# Altium PCB KE_PDB_BMS_ver2.PcbDoc
Units mm, origin at the board's own origin, x right, y up, seen from the top; angles counter-clockwise.
Board outline 50.9 x 59.37 mm, 4 copper layers (L1 [Signal], L2 [GND], L3 [Power], L4 [Signal]), stack 1.369 mm thick; 43 components, 31 nets, 163 pads, 72 vias.
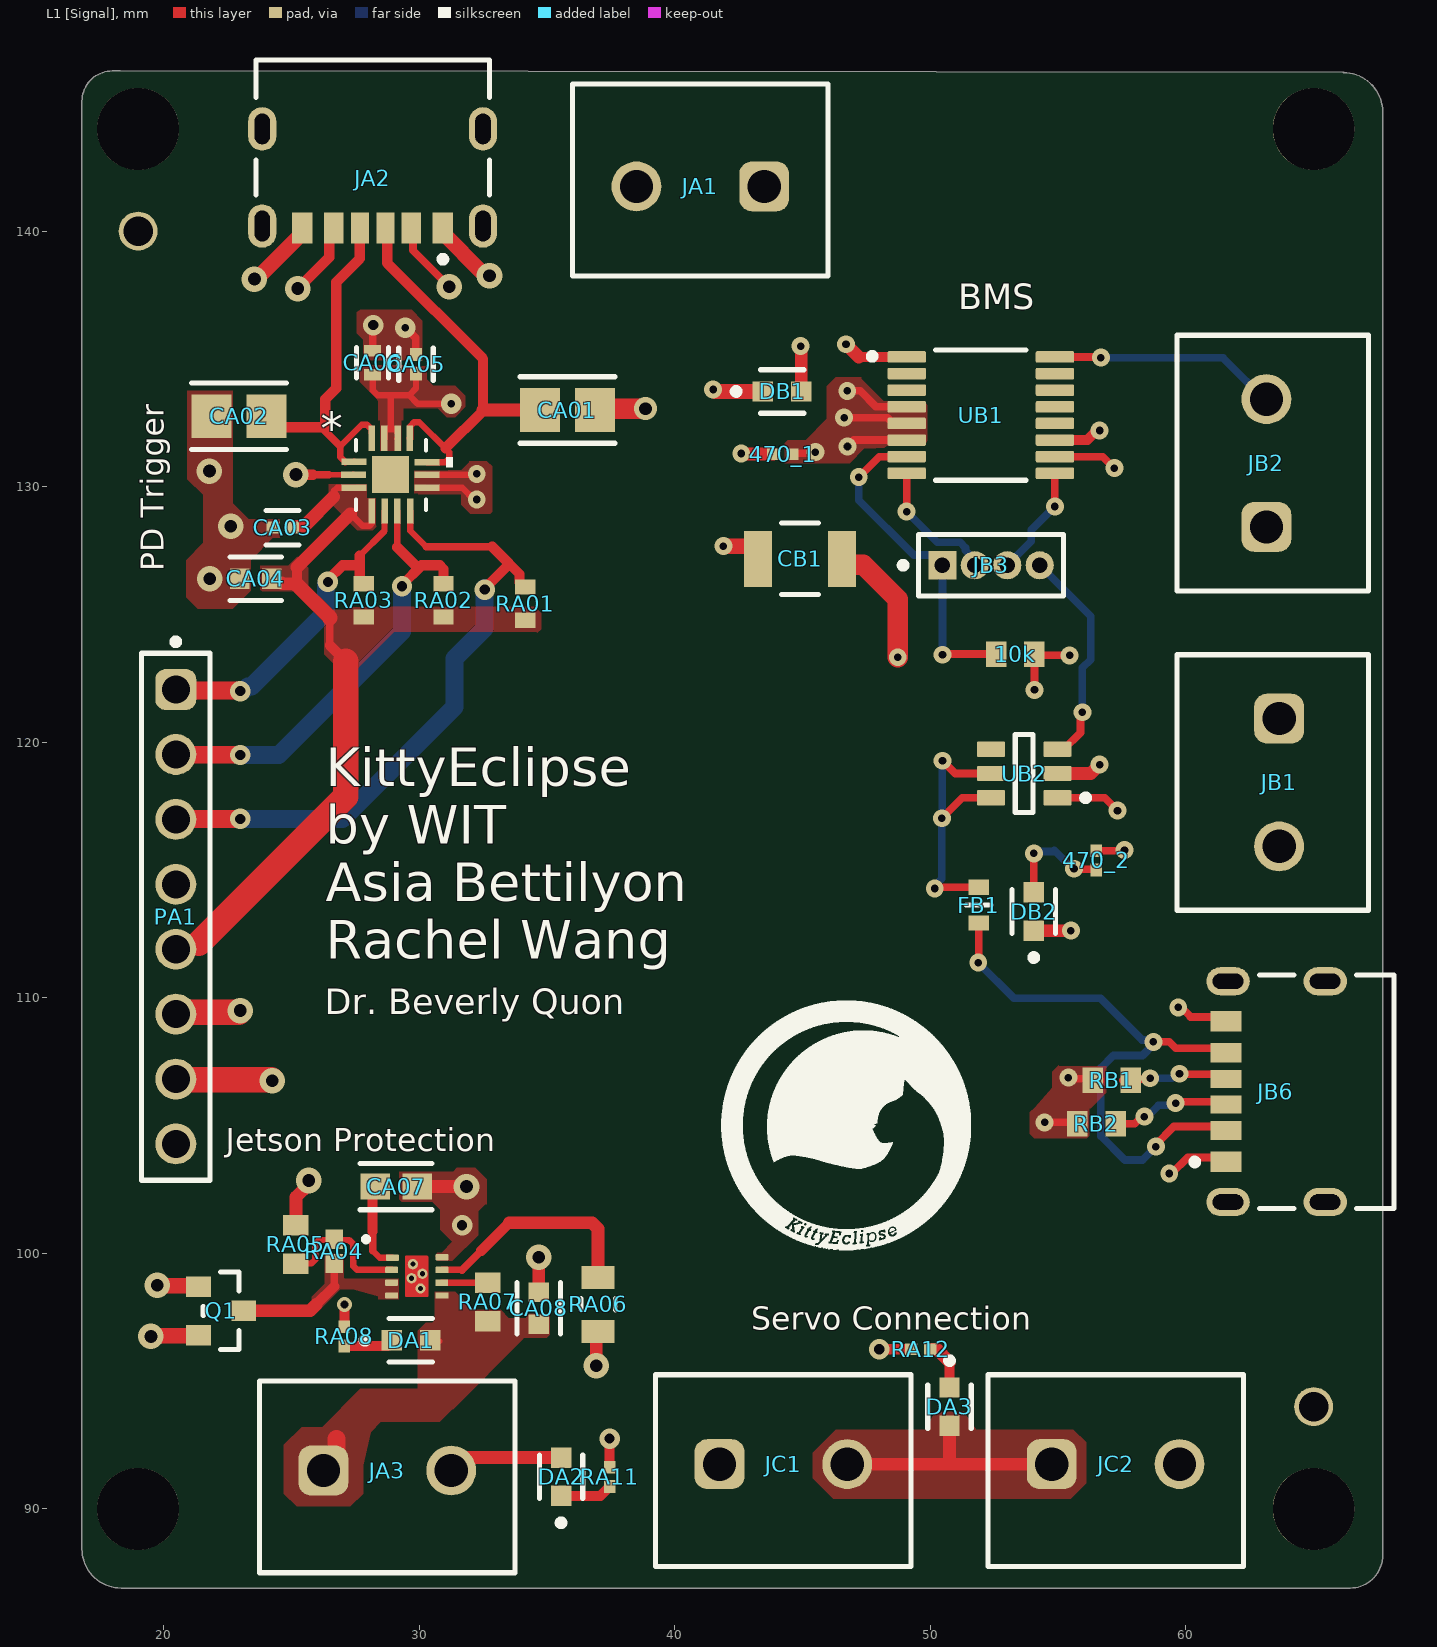
[diagram p0: L1 [Signal] view]
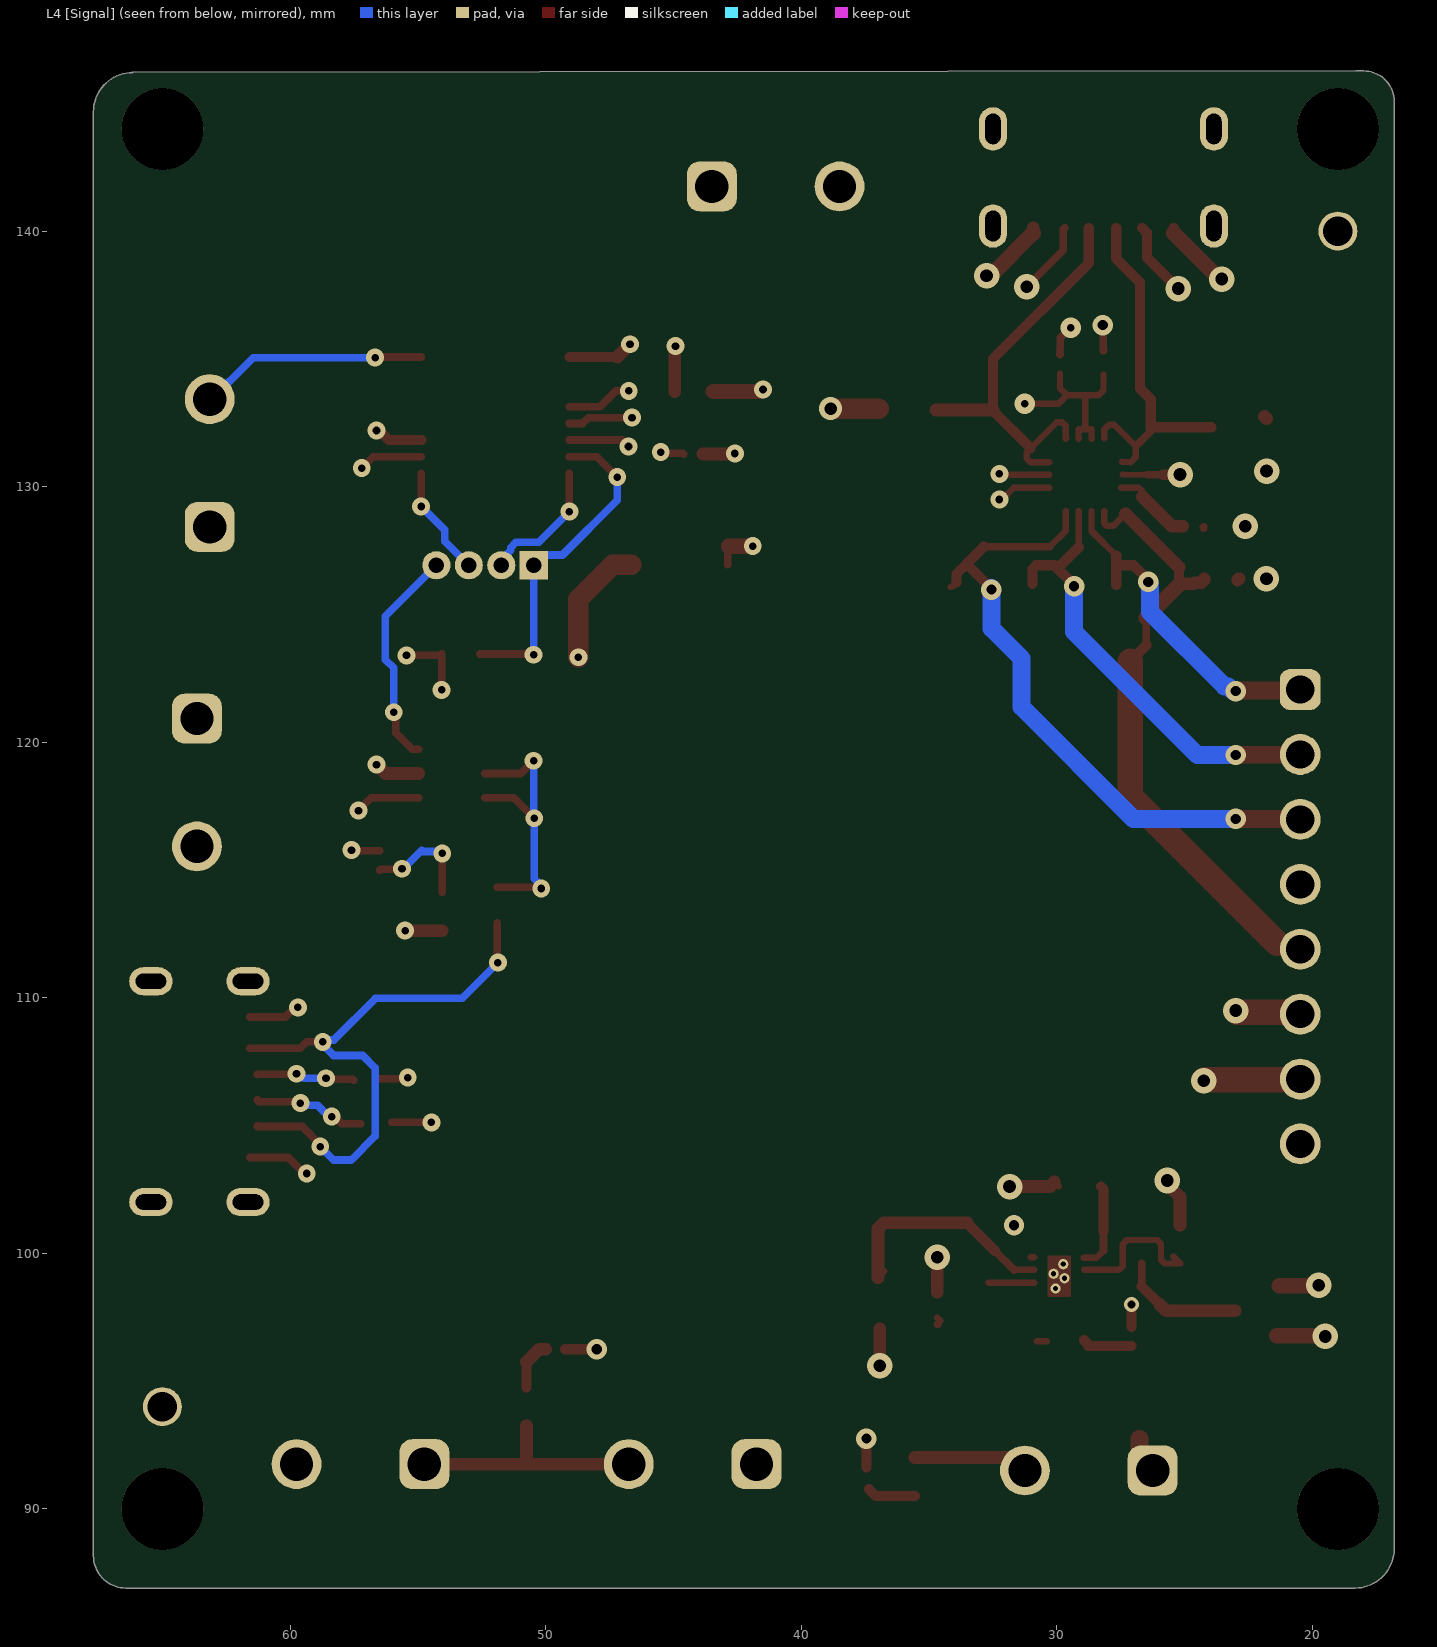
[diagram p1: L4 [Signal] view, seen from below]
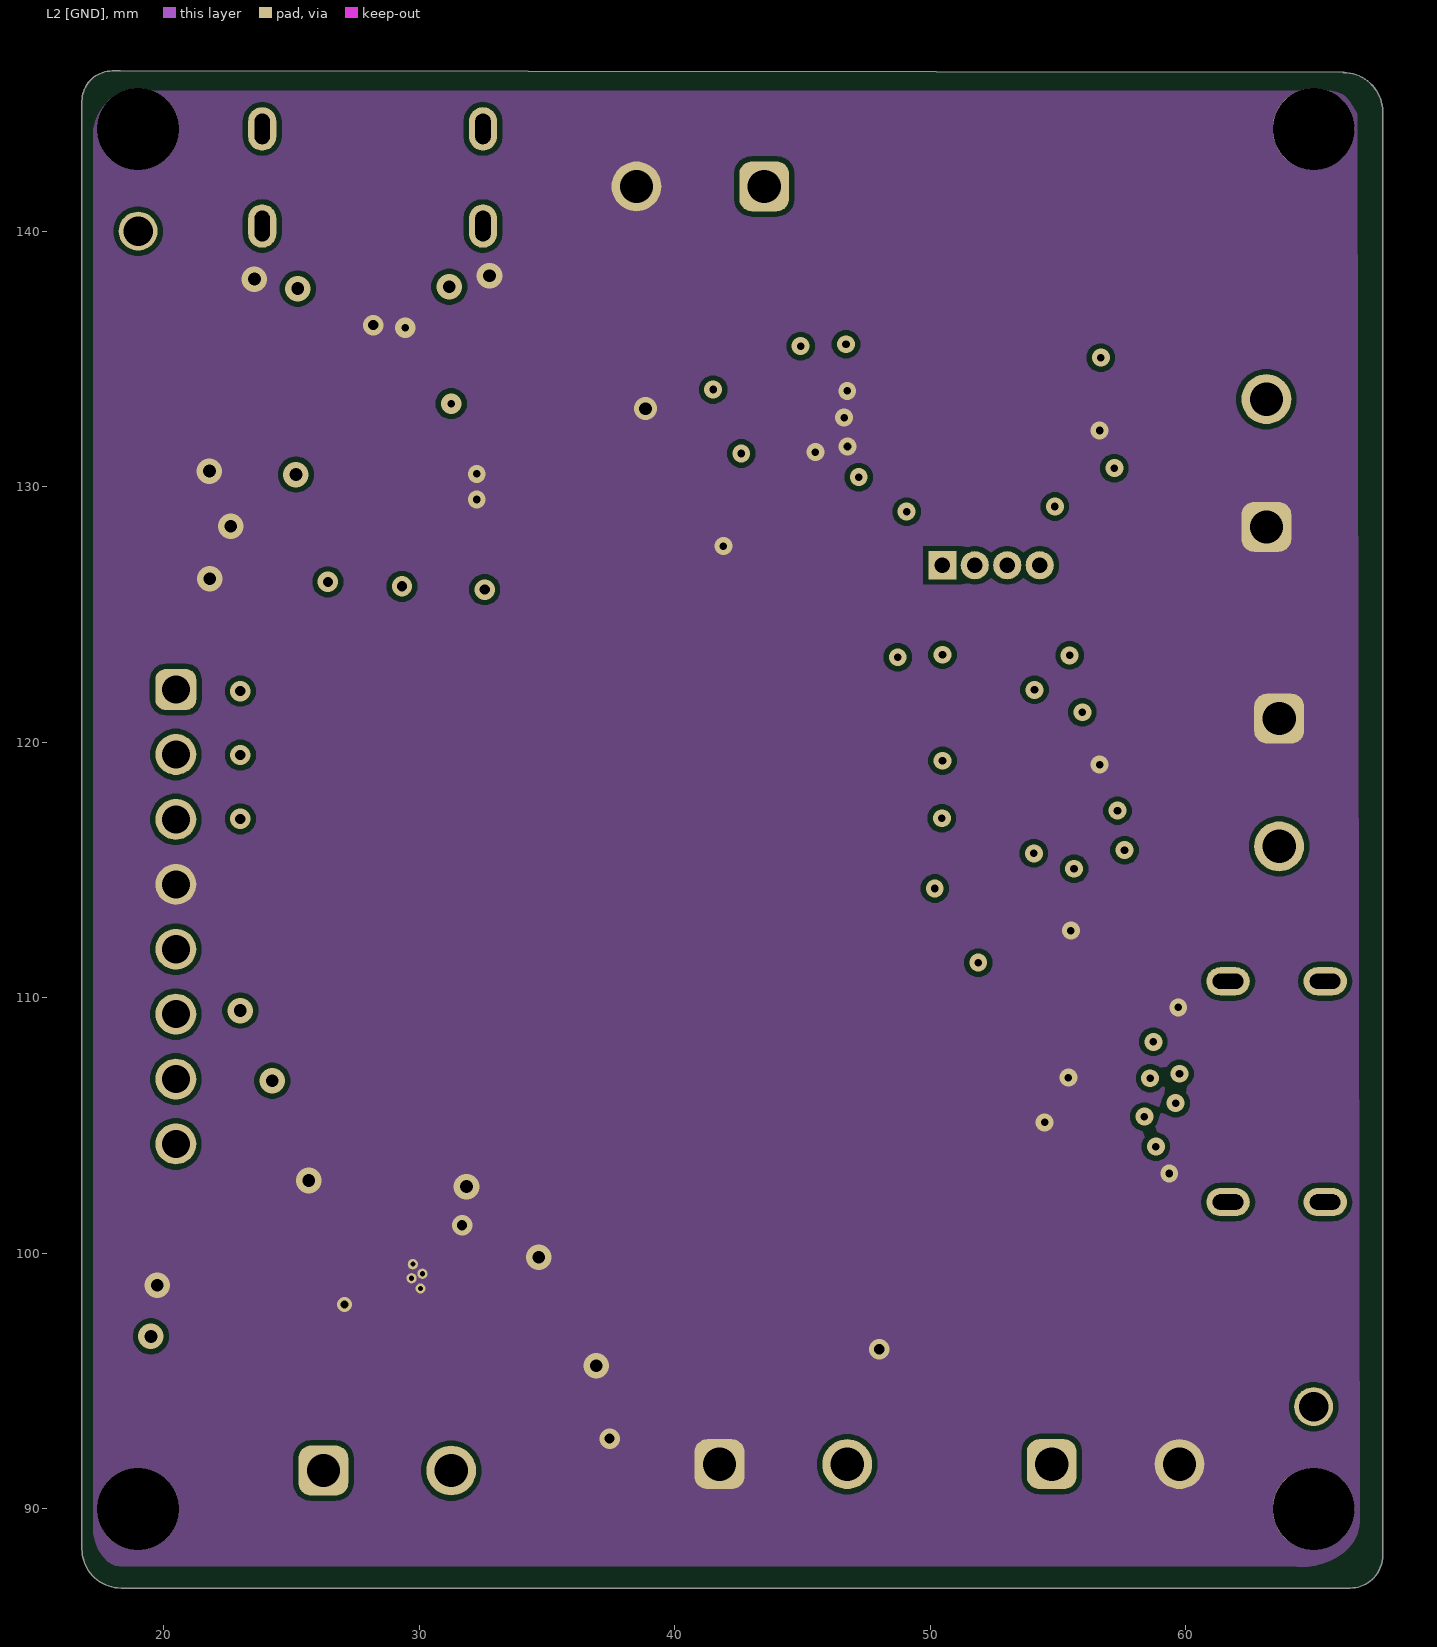
[diagram p2: L2 [GND]]
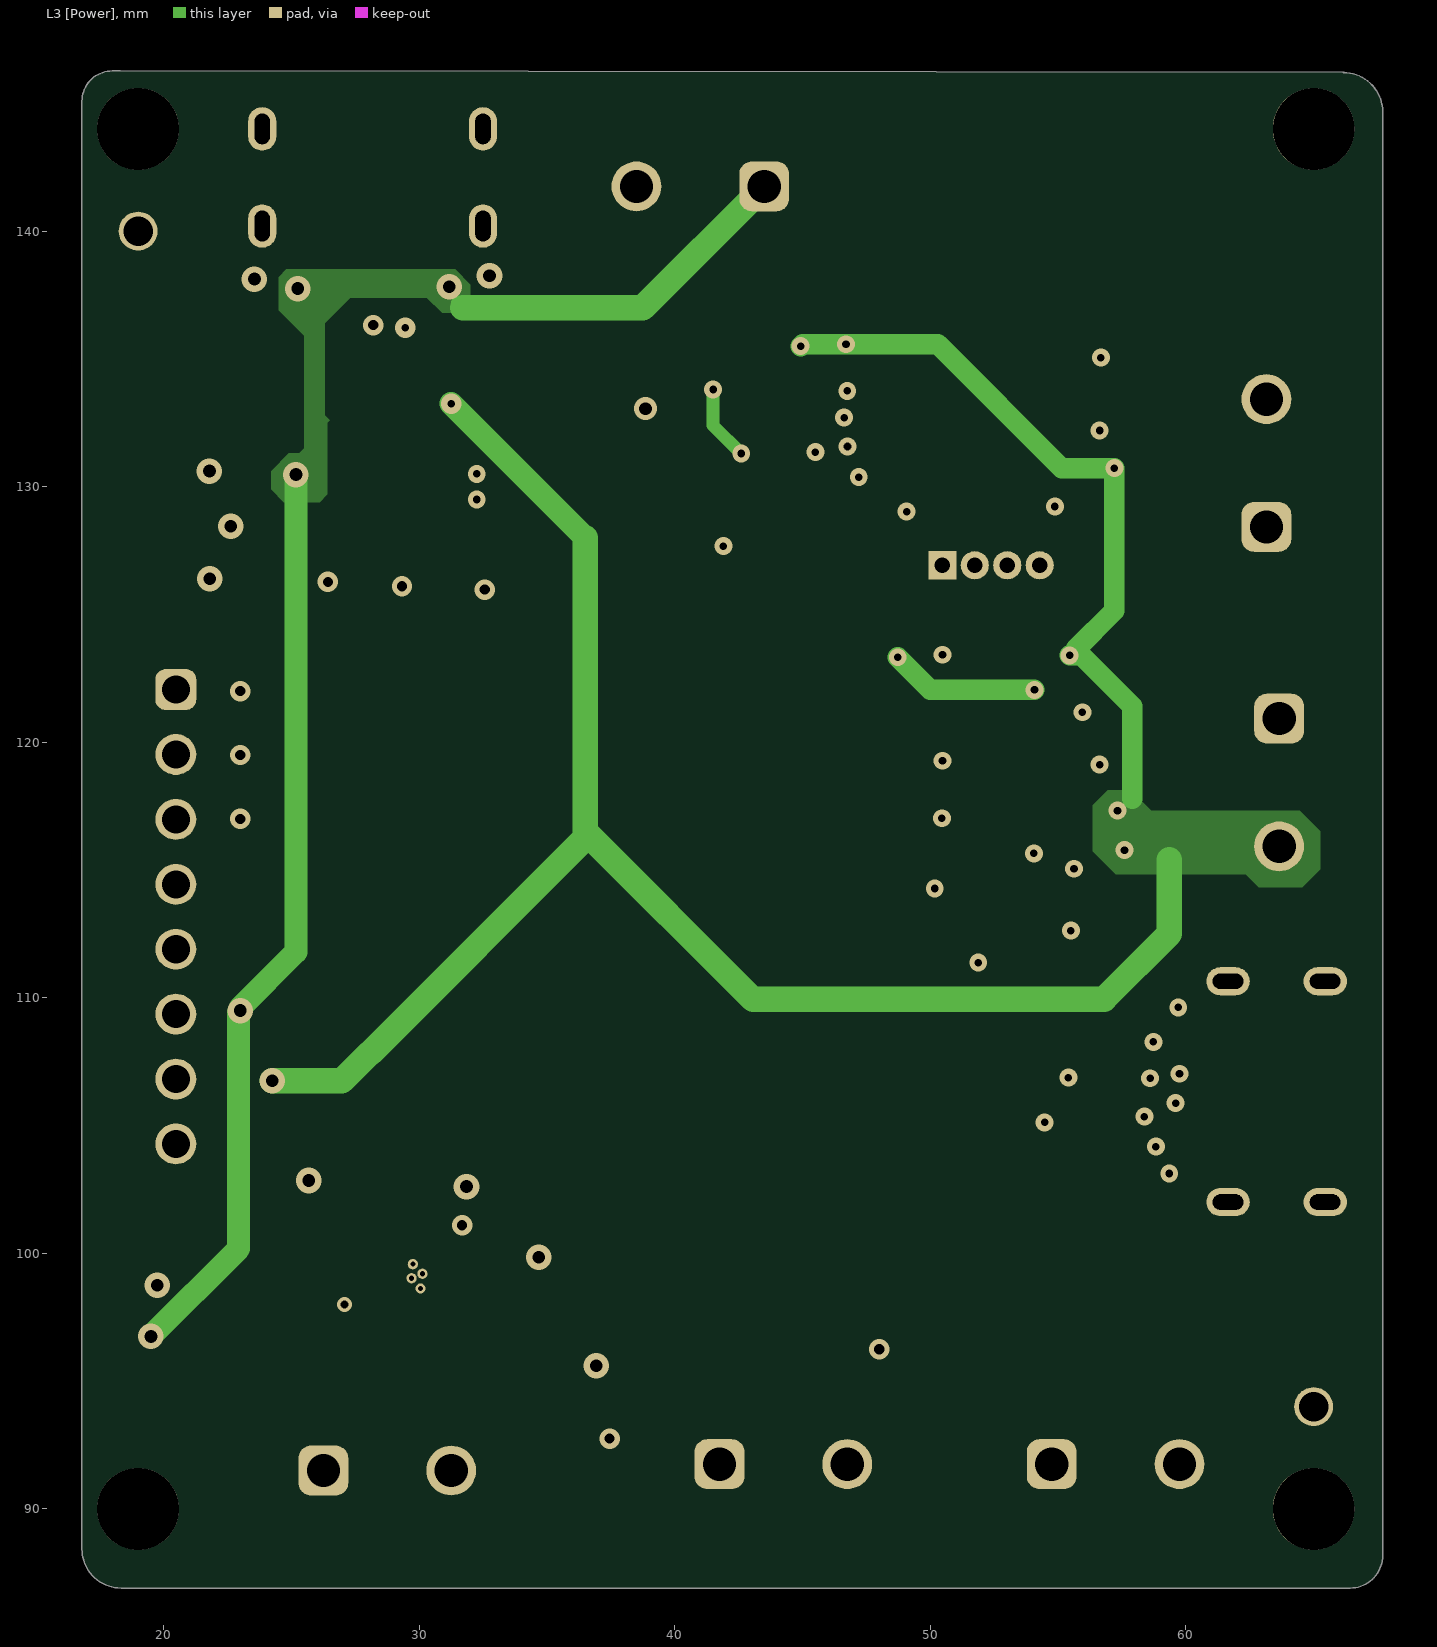
[diagram p3: L3 [Power]]
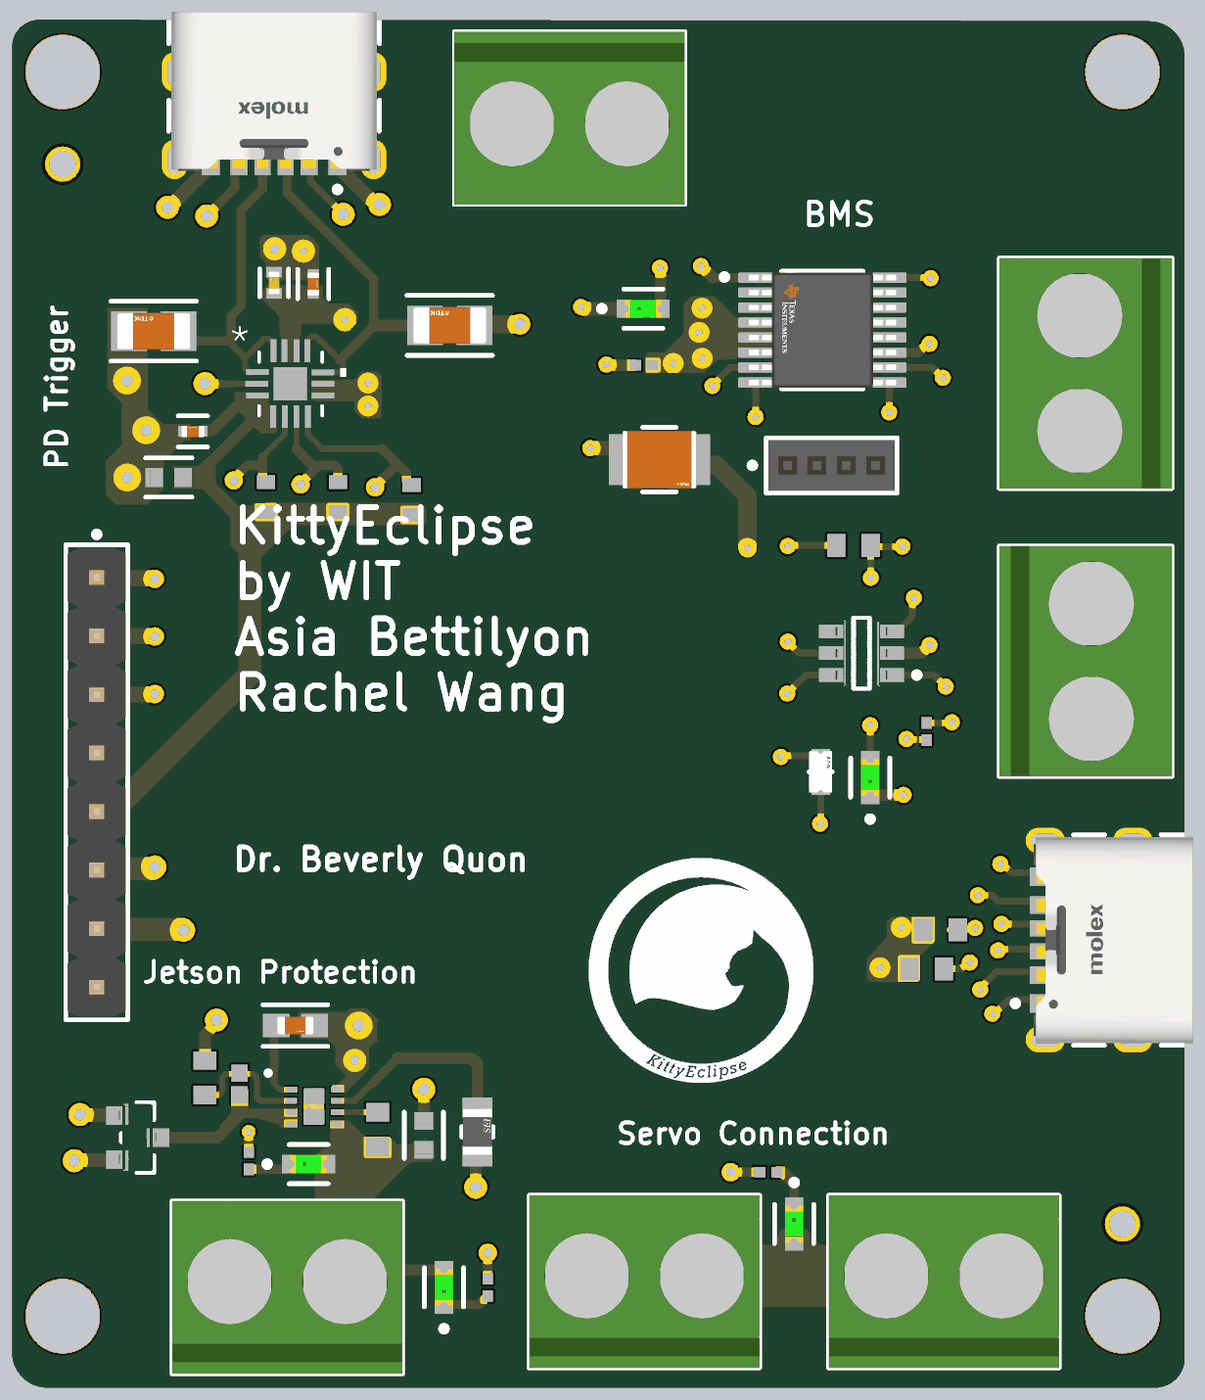
[diagram p4: 3D render of the assembled board from above, using the file's embedded part models]

## Layer stack, top to bottom
Top Solder: solder mask 0.0254, SM-001, Dk 4
L1 [Signal]: signal copper 0.035
Dielectric 1: prepreg 0.1295, PP-017, Dk 4.3
Dielectric 2: prepreg 0.1295, PP-017, Dk 4.3
L2 [GND]: signal copper 0.035
Dielectric 3: core 0.7112, Core-039, Dk 4.8
L3 [Power]: signal copper 0.035
Dielectric 4: prepreg 0.1295, PP-017, Dk 4.3
Dielectric 5: prepreg 0.1295, PP-017, Dk 4.3
L4 [Signal]: signal copper 0.035
Bottom Solder: solder mask 0.0254, SM-001, Dk 4

## Board outline
16.8,88.432 16.8,145.01 16.8,145.078 cw(c17.99,145.078) 17.99,146.268 18.3,146.268 66.2,146.211 66.168,146.2 cw(c66.168,144.668) 67.7,144.668 67.7,88.17 cw(c66.43,88.17) 66.43,86.9 18.332,86.9 cw(c18.332,88.432)

## Design rules (kind name [scope] priority, off if disabled: settings)
Clearance [All] p1: gap=0.2 ignorepadtopadclearanceinfootprint=TRUE
HoleSize ViaHoleSize [IsVia] p1: absolutevalues=TRUE maxlimit=6.3 minlimit=0.15 maxpercent=80.000 minpercent=20.000
HoleToHoleClearance [All] p1: gap=0.025 allowstackedmicrovias=TRUE
MinimumSolderMaskSliver [All] p1: minsoldermaskwidth=0.025
PolygonConnect [All] p1: connectstyle=Direct reliefconductorwidth=0.254 reliefentries=4 polygonreliefangle="90 Angle" airgapwidth=0.254
RoutingVias [All] p1: holewidth=0.711 width=1.27 viastyle="Through Hole" minholewidth=0.711 minwidth=1.27 maxholewidth=0.711 maxwidth=1.27
SilkToSolderMaskClearance [IsPad] p1: minsilkscreentomaskgap=0.025 clearancetoexposedcopper=TRUE
SolderMaskExpansion [All] p1: expansion=0.102 istentingtop=FALSE
SupplyNets "Schematic Supply Nets" [InNet('GND')] p1: voltage=0.000
UnRoutedNet [All] p1: checkbadconnections=TRUE
Width [All] p1: maxlimit=1 minlimit=0.2 preferedwidth=0.3 midlayer1_minwidth=0.254 midlayer2_minwidth=0.254 minimp=50.000000 maximp=50.000000 favimp=50.000000
25 further rules are at their usual default settings.

## Components (designator, comment, footprint, x,y, rotation, side; value= is the part's Value field where it differs from the comment)
10k "10k" RESC1608X55X25ML10T15 53.325,123.45 r180 top
470_1 "RC0402JR-07470RL" RESC1005X40X25LL05T10 44.225,131.275 r180 top
470_2 "RC0402JR-07470RL" RESC1005X40X25LL05T10 56.5,115.375 r270 top
CA01 "470pF" FP-C3216-085-0_2-IPC_C 35.8,133 r180 top
CA02 "470pF" FP-C3216-085-0_2-IPC_C 22.949,132.75 r180 top
CA03 "0.1uF" FP-CL93-IPC_C 24.65,128.4 r180 top
CA04 "1uF" FP-CL10-IPC_C 23.6,126.4 r180 top
CA05 "0.1uF" FP-CL93-IPC_C 29.875,134.796 r90 top
CA06 "10uF" FP-CL05A106MP5NUNC-MFG 28.175,134.85 r90 top
CA07 "3.3uF" FP-GRM188-0_1-e0_2_0_5-IPC_A 29.1,102.613 r0 top value=3.3nF
CA08 "1uF" FP-CL10-IPC_C 34.675,97.85 r90 top
CB1 "C3225X5R1E106M250AA" FP-C3225-250-0_4-MFG 44.9,127.175 r0 top
DA1 "LED off = fault" FP-LTST-C190GKT-MFG 29.675,96.6 r0 top
DA2 "LED off=fault" FP-LTST-C190GKT-MFG 35.549,91.255 r90 top
DA3 "LED off=fault" FP-LTST-C190GKT-MFG 50.75,94 r270 top
DB1 "LTST-C190GKT" FP-LTST-C190GKT-MFG 44.2,133.725 r0 top
DB2 "LTST-C190GKT" FP-LTST-C190GKT-MFG 54.05,113.375 r90 top
FB1 "3A 6V PTC Fuse" FP-PTSLR06036V300-MFG 51.9,113.625 r270 top
JA1 "691137710002" 691137710002 41,142 r180 top
JA2 "217175-0001" FP-217175-0001-MFG 28.175,143.15 r180 top
JA3 "691137710002" 691137710002 28.75,91.25 r0 top
JB1 "691137710002" 691137710002 63.4,118.425 r270 top
JB2 "691137710002" 691137710002 63.4,130.925 r90 top
JB3 "LPPB041NFFN-RC" FP-LPPB041NFFN-RC-MFG 52.375,126.925 r0 top
JB6 "217175-0001" FP-217175-0001-MFG 64.6,106.325 r90 top
JC1 "691137710002" 691137710002 44.25,91.5 r0 top
JC2 "691137710002" 691137710002 57.25,91.5 r0 top
PA1 "61300811121" 61300811121 20.475,113.17 r270 top
Q1 "IRLML6402TRPBF" FP-Micro3-MFG 22.25,97.75 r0 top
RA01 "4.7k" RESC1608X55X25LL10T15 34.15,125.425 r90 top value=4.7kOhms
RA02 "4.7k" RESC1608X55X25LL10T15 30.95,125.55 r90 top value=4.7kOhms
RA03 "4.7k" RESC1608X55X25LL10T15 27.825,125.55 r90 top value=4.7kOhms
RA04 "30k" RESC1005X40X25ML10T10 26.675,100.075 r270 top
RA05 "10k" RESC1608X55X25ML10T15 25.175,100.35 r270 top
RA06 "510" FP-RMCF0805-MFG 37,98 r90 top value=510R
RA07 "10k" RESC1608X55X25ML10T15 32.675,98.1 r90 top value=10kOhms
RA08 "470" RESC1005X40X25LL05T10 27.075,96.75 r90 top
RA11 "470" RESC1005X40X25LL05T10 37.45,91.25 r90 top
RA12 "470" RESC1005X40X25LL05T10 49.625,96.25 r180 top
RB1 "5.1k" RESC1608X55X25ML10T15 57.1,106.775 r0 top
RB2 "5.1k" RESC1608X55X25ML10T15 56.5,105.075 r0 top
UB1 "INA260AIPWR" FP-PW0016A-MFG 51.975,132.8 r0 top
UB2 "TPS22918DBVR" FP-DBV0006A-MFG 53.675,118.775 r180 top

## Footprints (in the part's own frame and the unit in brackets; to place one, negate y for a bottom-side part, rotate by r counter-clockwise, add the part's x,y. Pads: shape width x height; smd on the part's side, far side on the other; paste and mask are expansions set on the pad)
61300811121 [mm] "Pin Header, pitch 2.54 mm, THT, Vertical, single row, 8p"
  rrect50% 1.6x1.6 hole 1.1: 1(-8.89,0)
  round 1.6 hole 1.1: 2(-6.35,0) 3(-3.81,0) 4(-1.27,0) 5(1.27,0) 6(3.81,0) 7(6.35,0) 8(8.89,0)
  silkscreen extent -10.88,-1.35 10.31,1.35, body extent -10.16,-1.27 10.16,1.27, height 8.57
691137710002 [mm] "Horizontal Cable Entry with Pressure Clamp, pitch 5mm, 02p"
  rrect50% 1.95x1.95 hole 1.3: 1(-2.5,0.25)
  round 1.95 hole 1.3: 2(2.5,0.25)
  silkscreen extent -5,-3.75 5,3.75, body extent -5,-3.75 5,3.75, height 11.6
FP-217175-0001-MFG [mm]
  rrect100% 1.1x1.7 hole 1.2 slot 0.6 at 0 deg paste-2539.97 mask+0: 1(-4.32,2.95) 2(4.32,2.95) 3(-4.32,-0.85) 4(4.32,-0.85)
  rect 0.7x1.2 smd paste+0 mask+0: A5(-0.5,3.03) B5(0.5,3.03)
  rect 0.76x1.2 smd paste+0 mask+0: A9(1.52,3.03) B9(-1.52,3.03)
  rect 0.8x1.2 smd paste+0 mask+0: A12(2.75,3.03) B12(-2.75,3.03)
  silkscreen extent -4.57,-3.55 4.57,4.37, body extent -4.97,-3.65 4.97,3.9, height 0.25
FP-C3216-085-0_2-IPC_C [mm]
  rect 1.554x1.706 smd paste+0 mask+0: 1(-1.076,0) 2(1.076,0)
  silkscreen extent -1.85,-1.3 1.85,1.3, body extent -1.95,-1 1.95,1, height 0.25
FP-C3225-250-0_4-MFG [mm]
  rect 1.1x2.2 smd paste+0 mask+0: 1(-1.65,0) 2(1.65,0)
  silkscreen extent -0.72,-1.4 0.72,1.4, body extent -2.3,-1.5 2.3,1.5, height 0.25
FP-CL05A106MP5NUNC-MFG [mm]
  rect 0.45x0.675 smd paste+0 mask+0: 1(-0.463,0) 2(0.463,0)
  silkscreen extent -0.6,-0.63 0.6,0.63, body extent -0.79,-0.45 0.79,0.45, height 0.25
FP-CL10-IPC_C [mm]
  rect 0.758x0.812 smd paste+0 mask+0: 1(-0.627,0) 2(0.627,0)
  silkscreen extent -1.01,-0.85 1.01,0.85, body extent -1.11,-0.55 1.11,0.55, height 0.25
FP-CL93-IPC_C [mm]
  rect 0.515x0.472 smd paste+0 mask+0: 1(-0.379,0) 2(0.379,0)
  silkscreen extent -0.64,-0.67 0.64,0.67, body extent -0.74,-0.38 0.74,0.38, height 0.25
FP-DBV0006A-MFG [mm]
  rrect17% 1.1x0.6 smd paste+0 mask+0: 1(-1.3,0.95) 2(-1.3,0) 3(-1.3,-0.95) 4(1.3,-0.95) 5(1.3,0) 6(1.3,0.95)
  silkscreen extent -2.53,-1.53 0.35,1.53, body extent -1.95,-1.78 1.95,1.78, height 0.25
FP-GRM188-0_1-e0_2_0_5-IPC_A [mm]
  rect 1.159x1.012 smd paste+0 mask+0: 1(-0.827,0) 2(0.827,0)
  silkscreen extent -1.41,-0.91 1.41,0.91, body extent -1.91,-1.01 1.91,1.01, height 0.25
FP-LPPB041NFFN-RC-MFG [mm]
  rect 1.1x1.1 hole 0.6 paste-2539.97 mask+0: 1(-1.905,0)
  round 1.1 hole 0.6 paste-2539.97 mask+0: 2(-0.635,0) 3(0.635,0) 4(1.905,0)
  silkscreen extent -3.56,-1.2 2.84,1.2, body extent -2.94,-1.3 2.94,1.3, height 0.25
FP-LTST-C190GKT-MFG [mm]
  rect 0.8x0.8 smd paste+0 mask+0: 1(-0.75,0) 2(0.75,0)
  silkscreen extent -1.92,-0.85 0.85,0.85, body extent -1.25,-0.55 1.25,0.55, height 0.25
FP-Micro3-MFG [mm]
  rect 0.972x0.802 smd paste+0 mask+0: 1(-0.885,0.95) 2(-0.885,-0.95) 3(0.885,0)
  silkscreen extent -0.7,-1.52 0.7,1.52, body extent -1.47,-1.87 1.47,1.87, height 0.25
FP-PTSLR06036V300-MFG [mm]
  rect 0.6x0.8 smd paste+0 mask+0: 1(-0.7,0) 2(0.7,0)
  silkscreen extent 0,-0.5 0,0.5, body extent -1.1,-0.6 1.1,0.6, height 0.25
FP-PW0016A-MFG [mm]
  rrect22% 1.5x0.45 smd paste+0 mask+0: 1(-2.9,2.275) 2(-2.9,1.625) 3(-2.9,0.975) 4(-2.9,0.325) 5(-2.9,-0.325) 6(-2.9,-0.975) 7(-2.9,-1.625) 8(-2.9,-2.275) 9(2.9,-2.275) 10(2.9,-1.625) 11(2.9,-0.975) 12(2.9,-0.325) 13(2.9,0.325) 14(2.9,0.975) 15(2.9,1.625) 16(2.9,2.275)
  silkscreen extent -4.37,-2.55 1.78,2.55, body extent -3.75,-2.8 3.75,2.8, height 0.25
FP-RMCF0805-MFG [mm]
  rect 0.9x1.3 smd paste+0 mask+0: 1(-1.05,0) 2(1.05,0)
  silkscreen extent -0.23,-0.67 0.23,0.67, body extent -1.6,-0.77 1.6,0.77, height 0.25
RESC1005X40X25LL05T10 [mm] "Chip Resistor, 2-Leads, Body 1.00x0.50mm, IPC High Density"
  rect 0.5x0.45 smd: 1(-0.375,0) 2(0.375,0)
  body extent -0.53,-0.27 0.53,0.28, height 0.4
RESC1005X40X25ML10T10 [mm] "Chip Resistor, 2-Leads, Body 1.00x0.50mm, IPC Low Density"
  rect 0.75x0.7 smd: 1(-0.475,0) 2(0.475,0)
  body extent -0.55,-0.3 0.55,0.3, height 0.4
RESC1608X55X25LL10T15 [mm] "Chip Resistor, 2-Leads, Body 1.60x0.80mm, IPC High Density"
  rect 0.6x0.8 smd: 1(-0.65,0) 2(0.65,0)
  body extent -0.85,-0.45 0.85,0.45, height 0.55
RESC1608X55X25ML10T15 [mm] "Chip Resistor, 2-Leads, Body 1.60x0.80mm, IPC Low Density"
  rect 0.8x1 smd: 1(-0.75,0) 2(0.75,0)
  body extent -0.85,-0.45 0.85,0.45, height 0.55

## Part data
10k RA05 RA07: library part CMP-2000-05022-1, "Resistor, 10 KOhm, +/- 5%, 100 mW, -55 to 155 degC, 0603 (1608 Metric), RoHS, Tape and Reel", Case Code - in=0603, Case Code - mm=1608, Manufacturer=Yageo, Operating Temperature Range=-55Cto+155C, Package Description="2-Pin Surface Mount Device, Body 1.6 x 0.8 mm", Package Reference=603, Power Rating=100mW, Resistance=10kOhms, Temperature Coefficient=100PPM/C, Tolerance=5%, Voltage Rating=50V, Datasheet URL=http://www.farnell.com/datasheets/443971.pdf, Datasheet Version="Rev. 4, 04/2009", Manufacturer URL=http://www.yageo.com/, Packaging=Reel, Product=ThickFilmResistorsGeneralPurpose, Series=RC, Termination Style=SMD/SMT
470_1 470_2: library part CMP-1011-00066-2, Manufacturer="Yageo / Phycomp", Part Number=RC0402JR-07470RL
CA01 CA02: library part CMP-08246-003272-1, "Multilayer Ceramic Capacitors 470pF ±5% 630V C0G SMD 1206", Case Code (Imperial)=1206, Case Code (Metric)=3216, Dielectric=C0G, Max Operating Temperature=125°C, Min Operating Temperature=-55°C, Package Quantity=1, Tolerance=5%, Voltage Rating=630V, Capacitance=470pF, Case/Package=1206, Depth=1.6mm, Height=0.85mm, Lead Free="Lead Free", Length=3.2mm, Mount="Surface Mount", Number of Pins=2, Packaging="Tape and Reel", Radiation Hardening=No, RoHS Compliant=Yes, Series=C, Termination=SMD/SMT, Thickness=0.039inch, Voltage Rating (DC)=630V, Weight=0.000571oz, Width=0.063inch
CA03 CA05: library part CMP-13271-000610-1, "Cap Ceramic 100nF 10V X7R ±10% SMD 0402 +125°C Paper T/R"
CA04 CA08: library part CMP-2000-06094-2, "Cap Ceramic 1uF 10V X7R ±10% Pad SMD 0603 +125°C T/R", Case Code (Imperial)=0603, Case Code (Metric)=1608, Dielectric=X7R, Max Operating Temperature=125°C, Min Operating Temperature=-55°C, Package Quantity=1, Tolerance=10%, Voltage Rating=10V, Capacitance=1uF, Case/Package=0603, Contact Plating=Tin, Depth=0.8mm, Height=0.8mm, Lead Free="Lead Free", Length=1.6mm, Mount="Surface Mount", Packaging="Tape and Reel", Radiation Hardening=No, Thickness=0.035inch, Voltage Rating (DC)=10V, Width=0.031inch
CA06: library part CMP-13271-000002-1, "CAP CER 10UF 10V X5R 0402", Manufacturer=Samsung, Manufacturer Part Number=CL05A106MP5NUNC, Temperature="-55°C to +85°C", Temperature Characteristic=X5R, Temperature Coefficient=15%, Temperature Range High=+85°C, Temperature Range Low=-55°C, Tolerance=20%, Voltage Rating=10V, Automotive=No, Capacitance=10uF, Category=Cap, ComponentLink2Description=Datasheet, ComponentLink2URL=http://www.samsungsem.com/kr/support/product-search/mlcc/__icsFiles/afieldfile/2019/05/10/19-CL05A106MP5NUNC.pdf, Device Class L1="Passive Components", Device Class L2=Capacitors, Device Class L3="Ceramic Capacitors", Digikey Description="CAP CER 10UF 10V X5R 0402", Height=0.7mm, Ipc Land Pattern Name=CAPC10050X50, Lead Free=Yes, Material=Ceramic, Octopart=https://octopart.com/cl05a106mp5nunc-samsung-22457395, Package=CL05A106MP5NUNC, RoHS=TRUE
CA07: library part CMP-2006-02467-2, "Chip Multilayer Ceramic Capacitors for General Purpose, 0603, 3300pF, C0G, 30ppm/°C, 5%, 50V", Capacitance=3.3nF, Case Code (Imperial)=0603, Case Code (Metric)=1608, Dielectric=C0G, Max Operating Temperature=125°C, Min Operating Temperature=-55°C, Package Quantity=4000, Tolerance=5%, Voltage=50V, Case/Package=0603, Depth=0.8mm, Height=0.8mm, Lead Free="Lead Free", Length=1.6mm, Material=Ceramic, Mount="Surface Mount", Packaging="Tape and Reel", Radiation Hardening=No, REACH SVHC="No SVHC", Termination=SMD/SMT, Thickness=0.035inch, Voltage Rating=50V, Voltage Rating (DC)=50V, Width=0.031inch
CB1: library part CMP-08246-006012-1, "Multilayer Ceramic Capacitors 10uF ±20% 25V X5R SMD 1210", Capacitance=10uF, Case Code (Imperial)=1210, Case Code (Metric)=3225, Dielectric=X5R, Dielectric Material=Ceramic, Max Operating Temperature=85°C, Min Operating Temperature=-55°C, Package Quantity=1, Tolerance=20%, Voltage=25V, Case/Package=1210, Construction=Flat, Depth=2.5mm, Height=2.5mm, Lead Free="Lead Free", Length=3.2mm, Mount="Surface Mount", Number of Pins=2, Packaging="Tape and Reel", Radiation Hardening=No, REACH SVHC="No SVHC", Resistor Type=Ceramic, RoHS Compliant=Yes, Series=C, Termination=SMD/SMT, Thickness=0.11inch, Voltage Rating=25V, Voltage Rating (DC)=25V, Weight=0.000564oz, Width=0.098inch
DA1 DA2 DA3 DB1 DB2: library part CMP-22017-000005-2, "LED GREEN CLEAR CHIP SMD", Case Code (Imperial)=0603, Case Code (Metric)=1608, Color=Green, Forward Current=30mA, Forward Voltage=2.1V, Lens Color=Colorless, Max Operating Temperature=85°C, Min Operating Temperature=-55°C, Package Quantity=1, Power Dissipation=100mW, Reverse Voltage=5V, Test Current=10mA, Voltage=2V, Case/Package=0603, Depth=0.8mm, Dominant Wavelength=569nm, Height=0.8mm, Illumination Color=Green, Lead Free="Lead Free", Length=1.6mm, Lens Style=Clear, Lens Transparency=Clear, Luminous Intensity=6mcd, Mount="Surface Mount", Number of Elements=1, Number of LEDs=1, Number of Pins=2, Packaging="Tape and Reel", Power Rating=100mW, Radiation Hardening=No, Viewing Angle=130°, Wavelength=565nm, Width=0.8mm
FB1: library part CMP-16244-000012-1, "PTC RESET FUSE 3A 6V 0603"
JA1 JA3 JB1 JB2 JC1 JC2: library part CMP-1502-03324-2, Current Rating=16A, Max Operating Temperature=120°C, Min Operating Temperature=-30°C, Voltage Rating=300V, Contact Material="Nickel, Tin", Height=11.6mm, Lead Pitch=5mm, NexarPartId=78871135, Number of Contacts=2, Number of Pins=2, Number of Rows=1, Packaging=Box, RoHS=Non-Compliant
JA2 JB6: library part CMP-04767-000026-1, "CONN RCP USB2.0 C 6+18P SMD RA"
JB3: library part CMP-25680-000035-1, "CONN HDR 4POS 0.05 GOLD PCB", Package Quantity=1, Connector Type=Header, Contact Plating=Gold, Contact Type="Female Socket", Lead Free="Lead Free", Mount="Through Hole", Number of Positions=4, Number of Rows=1, Packaging=Bulk, Pitch=0.05inch, RoHS Compliant=Yes, Termination=Solder
PA1: library part CMP-1502-01076-3, Color=Black, Contact Resistance=20mΩ, Current Rating=3A, Max Operating Temperature=105°C, Min Operating Temperature=-40°C, Operating Supply Voltage=250V, Connector Type="Male Pin", Contact Material=Copper, Contact Mating Length=5.9944mm, Contact Plating=Gold, Gender=Male, Height=8.54mm, Lead Pitch=2.54mm, Mount="Through Hole", NexarPartId=32855533, Number of Contacts=8, Number of Pins=8, Number of Positions=8, Number of Rows=1, Orientation=Vertical, Packaging=Bulk, Pitch=2.54mm, REACH SVHC=Unknown, RoHS=Compliant, Termination=Solder, Voltage Rating=250V
Q1: library part CMP-32901-000130-1, "MOSFET P-CH 20V 3.7A SOT-23", Continuous Drain Current=-3.7A, Drain To Source Breakdown Voltage=-20V, Drain To Source Resistance=0.05Ω, Gate To Source Voltage=12V, Input Capacitace At Vds="633pF @ -10V", Manufacturer=Infineon, Max Forward Diode Voltage=-1.2V, Max Junction Temp=+150°C, Package=Micro3, Power Dissipation=1.3W, Pulse Drain Current=-22A, Temperature="-55°C to +150°C", Temperature Range Low=-55°C, Automotive=No, Category=Trans, ComponentLink2Description=Datasheet, ComponentLink2URL=https://www.infineon.com/dgdl/irlml6402pbf.pdf?fileId=5546d462533600a401535668d5c2263c, Depletion Mode=False, Device Class L1="Discrete Semiconductors", Device Class L2=Transistors, Device Class L3=MOSFETs, Digikey Description="MOSFET P-CH 20V 3.7A SOT-23", Drain To Source Voltage=-20V, Footprint Url=http://irf.com/package/outline/po_micro3.pdf, Gate Charge At Vgs="8nC @ -5V", Height=1.12mm, Ipc Land Pattern Name=SOT95P237X100-3, Lead Free=Yes, Manufacturer Part Number=IRLML6402TRPBF, Number of Channels=1, Number Of P Channels=1, Octopart=https://octopart.com/irlml6402trpbf-infineon-65874989, Reverse Recovery Charge=11nC, Reverse Recovery Time=29ns, RoHS=TRUE, Rthja Max=75°C/W, Standoff Height=0.01mm, Technology=MOSFET, Temperature Range High=+150°C, Threshold Vgs=-0.55V, Threshold Vgs Max=-1.2V, Threshold Vgs Min=-0.4V, Turn Off Delay Time=588ns, Turn On Delay Time=350ns
RA01 RA02 RA03: library part CMP-2000-06942-1, "Chip Resistor, 4.7 KOhm, +/- 1%, 0.1 W, -55 to 155 degC, 0603 (1608 Metric), RoHS, Tape and Reel", Case Code - in=0603, Case Code - mm=1608, Manufacturer=Yageo, Operating Temperature Range=-55Cto+155C, Package Description="2-Pin Surface Mount Device, Body 1.6 x 0.8 mm", Power Rating=100mW, Resistance=4.7kOhms, Temperature Coefficient=100PPM/C, Tolerance=1%, Voltage Rating=50V, Datasheet URL=http://www.yageo.com/documents/recent/PYu-RC_Group_51_RoHS_L_7.pdf, Datasheet Version="Rev. 7, 05/2017", Manufacturer URL=http://www.yageo.com/, Mounting Technology=SurfaceMount, Package Reference=0603, Packaging=Reel, Product=ThickFilmResistorsGeneralPurpose, Series=RC, Termination Style=SMD/SMT
RA04: library part CMP-2002-05800-1, Manufacturer=Panasonic, Part Number=ERA-2AEB303X
RA06: library part CMP-26527-004489-1, "510Ω ±5% 0.125W 0805 Thick Film Chip Resistor AEC-Q200 compliant", Case Code (Imperial)=0805, Case Code (Metric)=2012, Max Operating Temperature=155°C, Max Power Dissipation=125mW, Min Operating Temperature=-55°C, Resistance=510R, Resistor Type="Thick Film", Temperature Coefficient=200ppm/°C, Tolerance=5%, Case/Package=0805, Construction=Rectangular, Contact Plating=Tin, Depth=1.25mm, Features="Automotive AEC-Q200", Height=0.026inch, Lead Free="Lead Free", Length=0.079inch, Military Standard=Not, Mount="Surface Mount", Number of Terminations=2, Packaging="Tape and Reel", Power Rating=125mW, Radiation Hardening=No, RoHS Compliant=Yes, Series=RMCF, Size Code=0805, Width=0.049inch
RA08 RA11 RA12: library part CMP-1011-00066-2, Manufacturer="Yageo / Phycomp", Part Number=RC0402JR-07470RL
RB1 RB2: library part CMP-2000-04091-1, Manufacturer=Yageo, Part Number=RC0603FR-075K1L
UB1: library part CMP-04910-000015-1, "IC MONITOR PWR/CURR 16TSSOP", Ambient Temperature Range High=+125°C, Ambient Temperature Range Low=-40°C, Manufacturer="Texas Instruments", Max Junction Temp=+150°C, Max Supply Voltage=5.5V, Min Supply Voltage=2.7V, Nominal Supply Current=310uA, Output Current=10mA, Package=PW0016A, Temperature="-40°C to +125°C", Automotive=No, Category=IC, ComponentLink2Description=Datasheet, ComponentLink2URL=http://www.ti.com/lit/ds/symlink/ina260.pdf, Device Class L1="Integrated Circuits (ICs)", Device Class L2="Power Management ICs", Device Class L3=unset, Digikey Description="IC MONITOR PWR/CURR 16TSSOP", Height=1.2mm, Lead Free=Yes, Manufacturer Part Number=INA260AIPWR, Octopart=https://octopart.com/ina260aipwr-texas+instruments-75199489, RoHS=TRUE, Standoff Height=0.05mm, Temperature Range High=+125°C, Temperature Range Low=-40°C
UB2: library part CMP-04910-000024-2, "IC SINGLE CHANNEL LOAD SWITCH", Ambient Temperature Range High=105°C, Case/Package=SOT-23, Manufacturer Lifecycle Status=ACTIVE, Max Junction Temperature (Tj)=125°C, Max Output Current=2A, Max Supply Voltage=5.5V, Min Operating Temperature=-40°C, Min Supply Voltage=1V, Fall Time=2µs, Height=1.45mm, Interface=On/Off, Lead Free="Lead Free", Length=2.9mm, Lifecycle Status=Production, Max Operating Temperature=105°C, NexarPartId=71360943, Number of Channels=1, Number of Drivers=1, Number Of Outputs=1, Number of Pins=6, Output Configuration="High Side", Output Current=2A, Rise Time=2.54ms, RoHS=Compliant, Schedule B="8542390000, 8542390000", Thickness=1.2mm, Turn-Off Delay Time=2µs, Turn-On Delay Time=1.95ms, Width=1.6mm

## Free pads (board coordinates)
  rect 0.991x0.254 smd paste+0 mask+0: 1(27.45,130.975) 2(27.425,130.475) 3(27.45,129.95) 8(30.303,129.959) 9(30.303,130.459) 10(30.303,130.959)
  rrect25% 0.5x0.25 smd mask+0: 1(28.955,99.826) 2(28.92,99.35) 3(28.92,98.85) 4(28.92,98.35) 5(30.89,98.35) 6(30.88,98.851) 7(30.89,99.35) 8(30.89,99.85)
  rect 0.254x0.991 smd paste+0 mask+0: 4(28.142,129.048) 5(28.642,129.048) 6(29.142,129.048) 7(29.642,129.048) 11(29.625,131.9) 12(29.15,131.9) 13(28.625,131.9) 14(28.15,131.9)
  rect 0.1x0.1 smd paste-1 mask+0: 9(30.05,98.625)
  round 0.4 hole 0.2 mask+0: 10(30.125,99.2) 11(29.7,99.025)
  rect 1.448x1.448 smd paste+0 mask+0: 15(28.875,130.475)
  round 3.2 hole 3.2: 16(19,144) 17(65,144) 20(19,90) 21(65,90)
  round 0.4 hole 0.2: 25(30.05,98.625) 26(29.75,99.575)
  round 1.524 hole 1.152 unplated paste-2539.97 mask+0.148: TH(19,140) TH(65,94)

## Via types
v1: diameter 0.7, hole 0.3, L1 [Signal] to L4 [Signal], 42 vias
v2: diameter 1, hole 0.5, L1 [Signal] to L4 [Signal], 16 vias
v3: diameter 0.8, hole 0.4, L1 [Signal] to L4 [Signal], 10 vias
v4: diameter 0.8, hole 0.3, L1 [Signal] to L4 [Signal], 2 vias
v5: diameter 0.6, hole 0.3, L1 [Signal] to L4 [Signal], 1 vias
v6: diameter 0.9, hole 0.5, L1 [Signal] to L4 [Signal], 1 vias

## Nets (pads, with @x,y where several pads share a name; then routed paths per layer and width w, separated by ;. In a path a pad name is that pad's centre, name@x,y a point inside that pad or via, vN(x,y) a via of type N, cw(c..) or ccw(c..) an arc to the next point about the centre after c; other vN are vias at no path point)
GND: 470_1.1 CA01.1 CA02.2 CA03.2 CA04.2 CA05.2 CA06.2 CA07.2 CA08.2 CB1.1 DB2.1 JA1.2 JA2.A12 JA2.B12 JB1.1 JB2.1 JB6.A12 JB6.B12 JC1.1 JC2.2 PA1.4 pad.8 pad.9 pad.10@30.125,99.2 pad.11@29.7,99.025 pad.16 pad.17 pad.20 pad.21 pad.25 pad.26 Q1.1 RA05.1 RA06.1 RA08.2 RA11.2 RA12.2 RB1.1 RB2.1 UB1.4 UB1.5 UB1.6 UB1.11 UB2.2 | length 48.9
  L1 [Signal] w0.25: CA07.2 CA07.2@30.1,102.787 ; pad.8@30.303,129.959 31.684,129.959 32.143,129.5 v1(32.25,129.5) ; pad.9@30.303,130.459 30.305,130.461 32.211,130.461 v1(32.25,130.5)
  L1 [Signal] w0.254: Q1.1@21.315,98.75 Q1.1 ; pad.8@30.89,99.85 pad.8@31.011,99.85 ; v3@31.571,100.996 v3(31.675,101.1)
  L1 [Signal] w0.3: CA02.2 CA02.2@21.875,132.748 ; v2(22.625,128.45) v2@22.65,128.425 ; CA03.2@24.246,128.375 CA03.2 CA03.2@24.246,128.425 ; CA06.2 28.188,135.325 28.188,136.313 v3(28.2,136.325) ; v4(29.45,136.225) 29.456,136.225 29.863,135.818 29.863,135.283 29.875,135.27 CA05.2 ; CA01.1 CA01.1@36.901,132.975 ; JA1.2@38.475,141.725 JA1.2 ; CB1.1@42.85,127.675 42.875,127.65 CB1.1@42.875,126.95 ; 470_1.1 44.638,131.312 45.462,131.312 v1(45.5,131.35) ; v1(46.625,132.7) 48.325,132.7 48.55,132.475 UB1.5 ; v1(46.75,133.75) 47.25,133.75 47.875,133.125 UB1.4 ; v1(46.758,131.575) 47.008,131.825 UB1.6 ; v1(54.475,105.125) RB2.1@56.025,105.125 ; v1(55.4,106.875) 55.45,106.825 56.625,106.825 RB1.1@56.675,106.775 ; v1@59.444,103.125 60.069,103.75 JB6.B12@61.57,103.75 ; v1(59.7,109.625) 59.808,109.625 60.183,109.25 JB6.A12@61.57,109.25
  L1 [Signal] w0.4: v2(23.55,138.125) v2@23.63,138.125 ; JA2.A12@25.425,139.92 JA2.A12 ; RA08.2 v5(27.075,98) ; RA11.2 v3(37.45,92.75) ; v3(48,96.25) RA12.2 ; UB1.11 56.142,131.825 56.517,132.2 v1(56.625,132.2)
  L1 [Signal] w0.5: v2(19.75,98.75) v2@19.775,98.725 ; Q1.1@21.29,98.725 Q1.1@21.315,98.75 ; CA02.2@21.791,132.663 CA02.2@21.875,132.748 ; CA04.2@22.873,126.4 CA04.2@22.923,126.35 ; RA05.1 25.175,102.201 25.675,102.701 v2(25.675,102.85) ; CA07.2@30.1,102.787 30.1,102.769 30.256,102.613 v2(31.85,102.613) ; JA2.B12@30.925,139.92 JA2.B12 ; v2@32.499,138.346 32.654,138.346 v2(32.75,138.25) ; CA08.2 v2(34.675,99.85) ; CA01.1@36.901,132.975 CA01.1@36.976,133.05 ; v2(36.925,95.6) RA06.1@36.925,97.05 ; DB2.1 v1(55.5,112.625) ; UB2.2 56.275,118.775 v1(56.625,119.125) ; JC2.2 JC2.2@59.775,91.775
  L1 [Signal] w0.6: v2@19.775,98.725 Q1.1@21.29,98.725 ; v2@23.63,138.125 JA2.A12@25.425,139.92 ; JA2.B12@30.925,139.92 v2@32.499,138.346 ; v1(41.9,127.675) CB1.1@42.85,127.675
  L1 [Signal] w0.8: CA01.1@36.976,133.05 v6(38.85,133.05)
  other v1: 59.35,103.125
  other v2: 21.8,126.4 21.791,130.609
Net10k_1: 10k.1 470_2.1 CA05.1 CA06.1 CB1.2 DB1.2 JB1.2 PA1.7 pad.12 pad.13 UB1.1 UB1.10 UB2.1 | length 129.3
  L1 [Signal] w0.25: CA06.1 28.175,133.775 28.37,133.58 28.892,133.58 ; pad.13 28.644,131.872 28.644,132.24 28.892,132.24 ; pad.12@29.144,131.872 pad.12 29.142,132.238 29.14,132.24 28.892,132.24 ; CA05.1 29.875,133.85 29.605,133.58 28.892,133.58 ; 28.892,132.24 28.892,133.58
  L1 [Signal] w0.254: 29.605,133.58 29.934,133.25 v4(31.25,133.25)
  L1 [Signal] w0.3: v1(44.925,135.5) v1@44.95,135.475 ; v1(54.075,122.05) 10k.1 54.125,123.4 v1(55.45,123.4) ; UB1.10 56.75,131.175 v1(57.2,130.725) ; UB2.1 56.825,117.825 v1(57.325,117.325) ; 470_2.1 57.575,115.75 v1(57.6,115.775)
  L1 [Signal] w0.4: 47.2,135.075 UB1.1
  L1 [Signal] w0.5: PA1.7 PA1.7@20.51,106.785 ; v2@24.215,106.785 v2(24.25,106.75) ; DB1.2 v1@44.95,135.475 ; v1(46.7,135.575) 47.2,135.075
  L1 [Signal] w0.8: CB1.2@46.65,126.95 47.375,126.95 48.725,125.6 v1(48.725,123.325)
  L1 [Signal] w1: PA1.7@20.51,106.785 v2@24.215,106.785
  L3 [Power] w0.5: v1(57.325,117.325) v1@57.336,117.336 ; v1@57.6,115.883 v1(57.6,115.775) v1@57.638,115.813
  L3 [Power] w0.6: 36.5,116.25 36.5,116.5
  L3 [Power] w0.8: v1(44.925,135.5) 45,135.575 50.3,135.575 55.15,130.725 v1(57.2,130.725) 57.2,125.15 v1@55.68,123.63 ; v1(48.725,123.325) 50,122.05 v1(54.075,122.05) ; v1(55.45,123.4) 55.911,123.4 57.9,121.411 57.9,117.781
  L3 [Power] w0.9: v4(31.25,133.25) 36.5,128
  L3 [Power] w1: v2(24.25,106.75) 26.975,106.75 28.075,107.85 28.1,107.85 36.5,116.25 ; 36.5,128 36.5,116.5 43.062,109.937 ; 43.225,109.95 56.8,109.95 59.35,112.5 59.35,115.404
  L4 [Signal] w0.3: v1(57.6,115.775) v1@57.675,115.85
Net10k_2: 10k.2 JB3.1 UB1.7 | length 13
  L1 [Signal] w0.3: v1(47.2,130.375) 48,131.175 UB1.7 ; v1(50.475,123.425) 50.5,123.45 10k.2
  L4 [Signal] w0.3: v1(47.2,130.375) 47.2,129.47 49.345,127.325 50.07,127.325 JB3.1 50.475,126.92 v1(50.475,123.425)
Net470_1_2: 470_1.2 DB1.1 | length 6.2
  L1 [Signal] w0.3: v1(41.5,133.8) v1@41.575,133.725 ; v1(42.6,131.3) v1@42.625,131.275
  L1 [Signal] w0.5: v1@42.625,131.275 470_1.2
  L1 [Signal] w0.6: v1@41.575,133.725 DB1.1
  L3 [Power] w0.5: v1(41.5,133.8) 41.5,132.4 v1(42.6,131.3)
Net470_2_2: 470_2.2 DB2.2 | length 4.3
  L1 [Signal] w0.3: DB2.2 v1(54.05,115.65) ; v1(55.625,115.05) 55.65,115.025 56.475,115.025 470_2.2
  L4 [Signal] w0.3: v1(54.05,115.65) 54.127,115.727 54.802,115.727 54.85,115.775 55.575,115.05 v1(55.625,115.05)
NetCA01_2: CA01.2 JA2.A5 pad.10@30.303,130.959 pad.11@29.625,131.9 | length 16.8
  L1 [Signal] w0.25: pad.11@29.625,131.9 29.644,131.872 29.644,132.369 29.796,132.521 30.004,132.521 31.025,131.5 31.175,131.35 31.175,131.105 31.029,130.959 pad.10@30.303,130.959
  L1 [Signal] w0.4: JA2.A5@28.75,140.12 28.75,138.75 32.5,135 32.5,133 ; 31.025,131.5 32.5,132.975
  L1 [Signal] w0.5: 32.5,133 33,133 CA01.2
NetCA02_1: CA02.1 JA2.B5 pad.1@27.45,130.975 pad.14 | length 14.7
  L1 [Signal] w0.25: pad.1@27.45,130.975 27.113,130.959 26.911,131.161 26.911,131.586 27.749,132.424 27.956,132.424 28.14,132.24 28.142,132.238 pad.14
  L1 [Signal] w0.3: 26.249,132.248 26.911,131.586
  L1 [Signal] w0.4: CA02.1@23.95,132.325 26.325,132.325 26.325,133.425 26.75,133.85 26.75,138 27.675,138.925 JA2.B5
NetCA03_1: CA03.1 CA04.1 PA1.5 pad.3@27.45,129.95 pad.4@28.142,129.048 RA01.1 RA02.1 RA03.1 | length 27.8
  L1 [Signal] w0.25: CA03.1 CA03.1@25.083,128.455 ; 26.647,129.603 26.647,129.811 26.793,129.957 27.479,129.957 pad.3@27.45,129.95 ; 27.312,128.938 27.786,128.464 27.994,128.464 ccw(c27.994,128.612) 28.142,128.612 28.142,129.048 pad.4@28.14,129.046
  L1 [Signal] w0.3: 25.176,126.201 25.221,126.156 ; 26.504,123.796 26.504,124.873
  L1 [Signal] w0.4: PA1.5 PA1.5@20.705,112.13 ; 25.221,126.156 25.221,126.847 ; 26.504,123.796 27.125,123.175
  L1 [Signal] w0.5: PA1.5@20.705,112.13 21.38,112.13 ; CA04.1 24.227,126.373 24.356,126.244 24.606,126.244 24.649,126.201 25.176,126.201 ; CA03.1@25.083,128.455 25.498,128.455 26.647,129.603 ; 25.221,126.847 27.312,128.938
  L1 [Signal] w0.6: 25.176,126.201 26.504,124.873
  L1 [Signal] w1: 21.38,112.13 27.125,117.875 27.125,123.175
NetCA07_1: CA07.1 pad.1@28.955,99.826 | length 3.4
  L1 [Signal] w0.25: 28.175,100.1 28.449,99.826 pad.1@28.955,99.826
  L1 [Signal] w0.3: 28.175,100.1 28.175,100.85
  L1 [Signal] w0.4: 28.175,100.85 28.175,102.515 CA07.1
NetCA08_1: CA08.1 DA1.2 JA3.1 pad.5@30.89,98.35 RA07.1 | length 2.7
  L1 [Signal] w0.25: DA1.2@30.392,96.567 DA1.2@30.788,96.567 ; CA08.1@34.552,97.35 CA08.1@34.675,97.473
  L1 [Signal] w0.3: CA08.1@34.648,97.223 CA08.1
  L1 [Signal] w0.7: JA3.1 26.762,92.012 26.762,92.737
  L4 [Signal] w0.25: JA3.1 JA3.1@26.679,91.929
NetDA1_1: DA1.1 RA08.1 | length 2
  L1 [Signal] w0.4: RA08.1 DA1.1@28.775,96.375 ; DA1.1@28.7,96.375 DA1.1
NetDA2_1: DA2.1 RA11.1 | length 1.9
  L1 [Signal] w0.4: DA2.1 37.08,90.505 RA11.1@37.35,90.775
NetDA2_2: DA2.2 JA3.2 | length 4.5
  L1 [Signal] w0.5: JA3.2 31.755,92.005 DA2.2
NetDA3_1: DA3.1 RA12.1 | length 2
  L1 [Signal] w0.4: DA3.1 50.75,95.75
  L1 [Signal] w0.5: RA12.1 50.25,96.25 50.75,95.75
NetDA3_2: DA3.2 JC1.2 JC2.1 | length 9.5
  L1 [Signal] w0.5: JC1.2 50.75,91.75 ; DA3.2 50.75,91.75 ; JC2.1 52,91.75 50.75,91.75
NetFB1_1: FB1.1 UB2.5 UB2.6 | length 11.2
  L1 [Signal] w0.3: v1(50.175,114.275) 50.225,114.325 FB1.1 ; v1(50.45,117.025) 51.25,117.825 UB2.6 ; v1(50.475,119.275) 50.975,118.775 UB2.5
  L4 [Signal] w0.3: v1(50.175,114.275) 50.175,114.383 50.45,114.658 v1(50.45,117.025) 50.463,117.037 50.463,119.262 v1(50.475,119.275)
NetFB1_2: FB1.2 JB6.A9 JB6.B9 | length 23.4
  L1 [Signal] w0.3: v1(51.875,111.375) 51.9,111.4 FB1.2 ; v1(58.727,108.273) 59.347,108.273 59.6,108.02 JB6.A9@61.57,108.02 ; v1(58.825,104.175) 58.825,104.255 59.532,104.962 61.277,104.962 JB6.B9@61.295,104.98
  L4 [Signal] w0.3: v1(51.875,111.375) 53.275,109.975 56.659,109.975 58.284,108.35 58.65,108.35 v1(58.727,108.273) 58.727,108.165 58.302,107.741 57.166,107.741 56.675,107.25 56.675,104.594 57.619,103.65 58.3,103.65 v1(58.825,104.175)
NetJA1_1: JA1.1 JA2.A9 JA2.B9 PA1.6 pad.2@27.425,130.475 Q1.2 | length 62.6
  L1 [Signal] w0.25: 26.466,130.459 pad.2@27.425,130.475
  L1 [Signal] w0.3: 25.84,130.465 26.46,130.465 ; JA2.B9 29.754,140.061 29.754,139.246 v2(31.175,137.825)
  L1 [Signal] w0.4: v2(25.175,130.475) 25.185,130.465 25.84,130.465 ; v2(25.25,137.75) 26.475,138.975 26.475,139.94 JA2.A9
  L1 [Signal] w0.5: v2(19.5,96.75) v2@19.525,96.775 ; PA1.6 PA1.6@20.545,109.43 ; v2@22.93,109.43 v2(23,109.5)
  L1 [Signal] w0.6: v2@19.525,96.775 Q1.2@21.39,96.775
  L1 [Signal] w1: PA1.6@20.545,109.43 v2@22.93,109.43
  L3 [Power] w0.5: v2(23,109.5) v2@23,109.615 ; 31.5,137.2 31.7,137
  L3 [Power] w0.9: v2(19.5,96.75) 22.93,100.18 v2@22.93,109.43 ; v2@23,109.615 25.175,111.79 v2(25.175,130.475)
  L3 [Power] w1: 31.7,137 38.75,137 JA1.1
NetJB2_2: JB2.2 UB1.16 | length 9.1
  L1 [Signal] w0.3: UB1.16 56.65,135.075 v1(56.675,135.05)
  L4 [Signal] w0.3: v1(56.675,135.05) 61.45,135.05 JB2.2@63.225,133.275
NetJB3_2: JB3.2 UB1.8 | length 5.2
  L1 [Signal] w0.3: v1(49.075,129.025) UB1.8
  L4 [Signal] w0.3: v1(49.075,129.025) 50.275,127.825 51.165,127.825 51.375,127.615 51.375,127.507 51.74,127.141 JB3.2
NetJB3_3: JB3.3 UB1.9 | length 4.4
  L1 [Signal] w0.3: v1(54.875,129.225) UB1.9
  L4 [Signal] w0.3: JB3.3 53.01,126.928 53.954,127.872 53.954,128.304 v1(54.875,129.225)
NetJB3_4: JB3.4 UB2.3 | length 8.7
  L1 [Signal] w0.3: UB2.3 55.225,119.725 55.875,120.375 55.875,121.102 v1(55.948,121.175)
  L4 [Signal] w0.3: JB3.4 56.275,124.93 56.275,123.235 55.948,122.908 v1(55.948,121.175)
NetJB6_A5: JB6.A5 RB2.2 | length 4.4
  L1 [Signal] w0.3: RB2.2 57.992,105.075 58.267,105.35 v1(58.375,105.35) ; v1(59.6,105.875) 59.662,105.938 61.232,105.938 JB6.A5@61.295,106
  L4 [Signal] w0.3: v1(58.375,105.35) 58.483,105.35 58.932,105.798 59.523,105.798 v1(59.6,105.875)
NetJB6_B5: JB6.B5 RB1.2 | length 3.9
  L1 [Signal] w0.3: RB1.2@57.525,106.775 57.562,106.812 58.563,106.812 v1(58.6,106.85) ; v1(59.75,107.025) 59.762,107.013 61.282,107.013 JB6.B5@61.295,107
  L4 [Signal] w0.3: v1(58.6,106.85) 59.467,106.85 59.642,107.025 v1(59.75,107.025)
NetPA1_1: PA1.1 pad.5@28.642,129.048 RA03.2 | length 13.2
  L1 [Signal] w0.25: 27.675,127.3 28.642,128.267 pad.5@28.642,129.048
  L1 [Signal] w0.4: v3(26.425,126.275) 26.425,126.35 27,126.925 27.675,126.925 ; RA03.2@27.675,126.163 27.675,126.925 ; 27.675,127.3 27.675,126.925
  L1 [Signal] w0.7: PA1.1 20.505,122.03 22.97,122.03 v3(23,122)
  L4 [Signal] w0.7: v3(23,122) 23.108,122 23.29,122.182 23.432,122.182 26.348,125.098 26.348,126.198 v3(26.425,126.275)
NetPA1_2: PA1.2 pad.6@29.142,129.048 RA02.2 | length 17.9
  L1 [Signal] w0.25: 29.142,127.633 pad.6@29.142,129.048 ; 29.85,126.925 30.1,126.925
  L1 [Signal] w0.3: v3(29.325,126.1) v3@29.325,126.15
  L1 [Signal] w0.4: 29.142,127.633 29.85,126.925 ; v3@29.325,126.15 30.1,126.925 30.804,126.925 30.95,126.779 RA02.2
  L1 [Signal] w0.7: PA1.2 20.485,119.51 22.99,119.51 v3(23,119.5)
  L4 [Signal] w0.7: v3(23,119.5) 24.501,119.5 29.325,124.324 v3(29.325,126.1)
NetPA1_3: PA1.3 pad.7@29.642,129.048 RA01.2 | length 25.6
  L1 [Signal] w0.25: pad.7@29.642,129.048 29.644,129.046 29.644,128.281 30.275,127.65 ; v3(32.56,125.975) v3@32.56,126.124 ; 33.425,126.875 33.529,126.875 ; RA01.2@33.926,126.25 34.101,126.075 RA01.2
  L1 [Signal] w0.3: 30.275,127.65 32.857,127.65
  L1 [Signal] w0.4: v3@32.525,125.975 33.425,126.875 ; 32.857,127.65 33.529,126.979 ; 33.632,126.875 33.926,126.581 RA01.2@33.926,126.25
  L1 [Signal] w0.7: PA1.3 20.485,116.99 22.99,116.99 v3(23,117)
  L4 [Signal] w0.7: v3(23,117) 27,117 31.375,121.375 31.375,123.275 32.55,124.45 v3@32.55,126.031
NetQ1_3: pad.3@28.92,98.85 pad.4@28.92,98.35 Q1.3 RA04.2 | length 5
  L1 [Signal] w0.3: 26.675,98.704 RA04.2
  L1 [Signal] w0.4: 25.971,98 26.675,98.704
  L1 [Signal] w0.5: Q1.3@23.014,97.75 25.721,97.75 25.971,98
NetRA04_1: pad.2@28.92,99.35 RA04.1 RA05.2 | length 5.9
  L1 [Signal] w0.25: RA05.2@25.45,99.875 RA05.2 25.779,99.6 25.925,99.746 25.925,100.375 26.071,100.521 26.675,100.521 27.254,100.521 27.425,100.35 27.425,99.496 27.571,99.35 pad.2@28.92,99.35
NetRA06_2: pad.7@30.89,99.35 RA06.2 | length 9.2
  L1 [Signal] w0.25: pad.7@30.89,99.35 31.675,99.35 ; RA06.2@36.75,99.3 RA06.2
  L1 [Signal] w0.3: 31.675,99.35 32.425,100.1
  L1 [Signal] w0.4: 32.425,100.1 33.52,101.195
  L1 [Signal] w0.5: 33.52,101.195 36.766,101.195 37,100.961 RA06.2
NetRA07_2: pad.6@30.88,98.851 RA07.2 | length 1.8
  L1 [Signal] w0.25: pad.6@30.88,98.85 RA07.2
pads on no net: JA2.1 JA2.2 JA2.3 JA2.4 JB6.1 JB6.2 JB6.3 JB6.4 PA1.8 UB1.2 UB1.3 UB1.12 UB1.13 UB1.14 UB1.15 UB2.4

## Polygon pours and split planes (outlines as drawn)
Net10k_1 on L3 [Power] "GND" (solid, pour order 8): 56.35,115.725 57.25,114.825 62.35,114.825 62.85,114.325 64.55,114.325 65.25,115.025 65.25,116.525 64.45,117.325 58.65,117.325 57.85,118.125 56.95,118.125 56.35,117.525
NetJA1_1 on L3 [Power] "GND" (solid, pour order 3): 24.5,138.2 24.8,138.5 31.4,138.5 32,137.9 32,136.8 30.9,136.8 30.3,137.4 26.6,137.4 26.1,136.9 24.5,136.9
NetJA1_1 on L3 [Power] "GND" (solid, pour order 10): 24.5,136.9 25.5,135.9 25.5,131.5 25.3,131.3 24.9,131.3 24.2,130.6 24.2,129.9 24.7,129.4 26.1,129.4 26.4,129.7 26.4,132.5 26.5,132.6 26.3,132.8 26.3,136.4 27.6,137.7 27.6,137.9 26.3,137.9 25.85,138.35 24.65,138.35
GND on L1 [Signal] "GND" (solid, pour order 37): 49.875,131.525 49.85,131.5 47.4,131.5 47.4,131.475 46.85,130.925 44.3,130.925 44.3,131.7 44.425,131.825 45.125,131.825 45.95,132.65 45.95,133.925 46.3,134.275 47.3,134.275 47.3,134.225 48.175,133.35 49.875,133.35
GND on L1 [Signal] "GND" (solid, pour order 38): 56.875,106.275 56.275,105.675 56.225,105.675 56.225,104.6 56.125,104.5 54.075,104.5 53.9,104.675 53.9,105.525 54.1,105.725 54.225,105.85 54.775,106.475 54.775,107.1 55.025,107.35 55.05,107.325 56.875,107.325
NetCA08_1 on L1 [Signal] "GND" (solid, pour order 21): 29.938,96.113 29.938,94.437 30.475,93.9 31.325,93.9 34,96.575 34.075,96.65 34.25,97.3 31.025,97.3
GND on L1 [Signal] "GND" (solid, pour order 41): 31.3,100.45 30.875,100.025 30.65,100.025 30.6,99.975 30.6,99.725 30.65,99.675 30.675,99.7 31.3,99.7 32.3,100.7 32.3,101.1 31.75,101.65 31.65,101.55 31.2,101.55 30.825,100.925 31.062,100.687
GND on L1 [Signal] "GND" (solid, pour order 39): 31.325,103.2 31.475,103.35 32.2,103.35 32.65,102.9 32.65,101.925 32.575,101.925 32.3,101.65 32.3,100.95 31.8,100.45 31.3,100.45 30.825,100.925 30.825,101.7 30.5,102.025 29.325,102.025 29.225,102.125 29.225,103.2
GND on L1 [Signal] "GND" (solid, pour order 34): 22.8,133.525 22.7,133.425 22.7,129.35 23.325,128.725 24.525,128.725 24.55,128.7 24.55,128 24.275,128 23.4,127.125 23.4,125.925 22.7,125.225 21.325,125.225 20.875,125.675 20.875,127.125 21.55,127.8 21.55,129.675 20.925,130.3 20.925,133.75 22.7,133.75 22.7,133.4
GND on L1 [Signal] "GND" (solid, pour order 33): 29.75,129.8 29.85,129.7 31.65,129.7 31.65,129.3 32,128.95 32.775,128.95 32.85,129.025 32.85,130.8 32.65,131 31.95,131 31.95,130.95 31.65,130.65 29.75,130.65
NetCA03_1 on L1 [Signal] "GND" (solid, pour order 32): 23.775,125.975 23.85,125.9 25.525,125.9 25.7,126.075 25.65,126.125 25.65,126.825 25.225,127.25 24.875,126.9 23.775,126.9
GND on L1 [Signal] "GND" (solid, pour order 29): 27.554,135.996 27.8,135.75 27.8,135.1 28,134.9 30.125,134.9 30.125,136.5 29.7,136.925 27.7,136.925 27.554,136.825
Net10k_1 on L1 [Signal] "GND" (solid, pour order 28): 28.4,131.425 28.475,131.35 29.25,131.35 29.375,131.475 29.375,133.075 30.725,133.075 31.075,132.725 31.4,132.725 31.8,133.125 31.8,133.55 31.4,133.95 30.55,133.95 30.3,134.2 30.3,134.75 27.875,134.75 27.675,134.55 27.675,134.1 28.35,133.425 28.35,133.375 28.4,133.375
NetCA03_1 on L1 [Signal] "GND" (solid, pour order 26): 28.3,129.6 28.3,128.475 28.325,128.45 28.175,128.3 27.575,128.3 26.45,129.425 26.45,130.1 27.95,130.1 27.95,129.6
NetCA03_1 on L1 [Signal] "GND" (solid, pour order 23): 27.225,125.2 27.2,125.175 26.275,125.175 26.275,123.45 27.212,122.513 29.15,124.45
NetCA03_1 on L1 [Signal] "GND" (solid, pour order 22): 27.975,125.3 34.525,125.3 34.775,125.05 34.775,124.425 34.625,124.275 34.575,124.325 27.275,124.325 27.15,124.45 27.15,125.125 27.3,125.275
NetCA08_1 on L1 [Signal] "GND" (solid, pour order 20): 30.613,98.488 31.413,98.488 32.113,97.788 33.188,97.788 33.513,97.463 34.188,97.463 34.188,97.538 34.288,97.638 35.113,97.638 35.113,96.813 34.987,96.688 32.188,96.688 31.963,96.913 31.927,96.877 31.552,96.877 30.788,96.113 29.938,96.113 29.938,96.963 30.263,97.288 30.513,97.288 30.613,97.388 30.613,98.063
NetQ1_3 on L1 [Signal] "GND" (solid, pour order 17): 29.159,99 27.1,99 27.05,99.05 27.05,100 26.3,100 26.3,98.8 25.8,98.3 25.8,98.1 26.1,97.8 26.9,98.6 27.4,98.6 28.8,98.2
NetQ1_3 on L1 [Signal] "NetQ1_3" (solid, pour order 16): 29.2,99 29.2,98.2 28.4,98.2 28.4,99
NetCA08_1 on L1 [Signal] "GND" (solid, pour order 12): 27.8,91.7 27.8,90.6 27.3,90.1 25.2,90.1 24.7,90.6 24.7,92.5 25.4,93.2 26.2,93.2 27.7,94.7 31.5,94.7 31.8,94.4 30.8,93.4 28.5,93.4 28.1,93
NetDA3_2 on L1 [Signal] "GND" (solid, pour order 11): 45.4,91.2 46.2,90.4 55.5,90.4 56.1,91 56.1,92.6 55.6,93.1 51.8,93.1 51.3,93.8 50.2,93.8 49.8,93.1 46.3,93.1 45.4,92.2
GND on L2 [GND] "GND" (solid, pour order 1): 17.25,143.793 cw(c18.957,143.793) 17.75,145 cw(c18.957,143.793) 18.957,145.5 65.6,145.5 cw(c65.584,144.468) 66.4,145.1 66.7,144.6 66.8,89.5 cw(c65.052,89.624) 66.2,88.3 cw(c64.486,90.559) 64.1,87.75 18.354,87.75 cw(c18.354,88.604) 17.75,88 cw(c18.957,89.207) 17.25,89.207 17.25,91.75

## Other copper
L1 [Signal]:
  region net GND: 30.308,99.899 30.31,99.899 30.313,99.898 30.315,99.898 30.318,99.897 30.32,99.896 30.323,99.895 30.325,99.893 30.327,99.892 30.329,99.89 30.331,99.889 30.333,99.887 30.335,99.885 30.337,99.883 30.339,99.881 30.34,99.879 30.342,99.877 30.343,99.875 30.345,99.873 30.346,99.87 30.347,99.868 30.348,99.865 30.348,99.863 30.349,99.86 30.349,99.858 30.35,99.855 30.35,99.853 30.35,99.85 30.35,98.35 30.35,98.347 30.35,98.345 30.349,98.342 30.349,98.34 30.348,98.337 30.348,98.335 30.347,98.332 30.346,98.33 30.345,98.327 30.343,98.325 30.342,98.323 30.34,98.321 30.339,98.319 30.337,98.317 30.335,98.315 30.333,98.313 30.331,98.311 30.329,98.31 30.327,98.308 30.325,98.307 30.323,98.305 30.32,98.304 30.318,98.303 30.315,98.302 30.313,98.302 30.31,98.301 30.308,98.301 30.305,98.3 29.495,98.3 29.492,98.301 29.49,98.301 29.487,98.302 29.485,98.302 29.482,98.303 29.48,98.304 29.477,98.305 29.475,98.307 29.473,98.308 29.471,98.31 29.469,98.311 29.467,98.313 29.465,98.315 29.463,98.317 29.461,98.319 29.46,98.321 29.458,98.323 29.457,98.325 29.455,98.327 29.454,98.33 29.453,98.332 29.452,98.335 29.452,98.337 29.451,98.34 29.451,98.342 29.45,98.345 29.45,98.347 29.45,98.35 29.45,99.85 29.45,99.853 29.45,99.855 29.451,99.858 29.451,99.86 29.452,99.863 29.452,99.865 29.453,99.868 29.454,99.87 29.455,99.873 29.457,99.875 29.458,99.877 29.46,99.879 29.461,99.881 29.463,99.883 29.465,99.885 29.467,99.887 29.469,99.889 29.471,99.89 29.473,99.892 29.475,99.893 29.477,99.895 29.48,99.896 29.482,99.897 29.485,99.898 29.487,99.898 29.49,99.899 29.492,99.899 29.495,99.9 30.305,99.9

## Silkscreen, mask and mechanical layers (free items; w line width, h text height)
Top Overlay:
  drawing of 9 lines, arcs and shapes, not listed
  text "BMS" at 51.1,136.95 h1
  text "*" at 26.149,131.653 h1.27
  text "PD Trigger" at 20,126.7 h0.9 r90
  text "KittyEclipse  / by WIT / Asia Bettilyon / Rachel Wang" at 26.35,111.525 h1.5
  text "Dr. Beverly Quon" at 26.3,109.358 h1
  text "Jetson Protection" at 22.425,104 h0.9
  text "Servo Connection" at 43,97 h0.9
Top Paste:
  drawing of 2 lines, arcs and shapes, not listed
Top Solder:
  drawing of 9 lines, arcs and shapes, not listed
Mechanical 1:
  lines w0.254: 16.8,145.01 16.8,88.432 ccw(c18.332,88.432) 18.332,86.9 66.4,86.9 ; 16.8,145.078 cw(c17.99,145.078) 17.99,146.268 18.3,146.268 66.2,146.211 ; 66.168,146.2 cw(c66.168,144.668) 67.7,144.668 67.7,88.17 cw(c66.43,88.17) 66.43,86.9
Mechanical 13:
  circle w0.2: c27.92,100.55 r0.1
  lines w0.025: 27.647,130.434 28.917,131.704 ; 27.392,129.807 27.392,130.111 27.647,130.111 27.647,129.807 27.392,129.807 ; 27.392,130.307 27.392,130.611 27.647,130.611 27.647,130.307 27.392,130.307 ; 27.392,130.807 27.392,131.111 27.647,131.111 27.647,130.807 27.392,130.807 ; 27.647,129.214 30.137,129.214 30.137,131.704 27.647,131.704 27.647,129.214 ; 27.99,128.959 27.99,129.214 28.294,129.214 28.294,128.959 27.99,128.959 ; 27.99,131.704 27.99,131.959 28.294,131.959 28.294,131.704 27.99,131.704 ; 28.49,128.959 28.794,128.959 28.794,129.214 28.49,129.214 28.49,128.959 ; 28.49,131.704 28.794,131.704 28.794,131.959 28.49,131.959 28.49,131.704 ; 28.99,128.959 28.99,129.214 29.294,129.214 29.294,128.959 28.99,128.959 ; 28.99,131.704 29.294,131.704 29.294,131.959 28.99,131.959 28.99,131.704 ; 29.49,128.959 29.49,129.214 29.794,129.214 29.794,128.959 29.49,128.959 ; 29.49,131.704 29.794,131.704 29.794,131.959 29.49,131.959 29.49,131.704 ; 30.137,129.807 30.392,129.807 30.392,130.111 30.137,130.111 30.137,129.807 ; 30.137,130.307 30.392,130.307 30.392,130.611 30.137,130.611 30.137,130.307 ; 30.137,130.807 30.392,130.807 30.392,131.111 30.137,131.111 30.137,130.807
  lines w0.127: 28.905,98.1 28.905,100.1 30.905,100.1 30.905,98.1 28.905,98.1
  text "*" at 27.659,130.574 h1.27
Mechanical 15:
  region: 27.505,128.695 27.137,128.695 27.137,129.312 26.476,129.312 26.476,131.582 27.137,131.582 27.137,132.2 27.505,132.2 27.505,132.862 30.275,132.862 30.275,132.2 30.643,132.2 30.643,131.582 31.304,131.582 31.304,129.312 30.643,129.312 30.643,128.695 30.275,128.695 30.275,128.033 27.505,128.033
  lines w0.05: 28.3,97.85 31.39,97.85 31.39,100.35 28.3,100.35 28.3,97.85
  lines w0.152: 26.478,129.324 26.478,132.212 27.139,132.212 27.507,132.212 27.507,132.873 30.277,132.873 30.277,132.212 30.645,132.212 30.645,131.594 31.306,131.594 31.306,129.324 30.645,129.324 30.645,128.706 30.277,128.706 30.277,128.045 27.507,128.045 27.507,128.706 27.139,128.706 27.139,129.324 26.478,129.324